# Altium PCB LEDArray8Key.PcbDoc (part 2 of 3)
Units mil, origin at the board's own origin, x right, y up, seen from the top; angles counter-clockwise.
Board outline 4724.41 x 3343 mil, 2 copper layers (Top Layer, Bottom Layer); 229 components, 203 nets, 838 pads, 171 vias.
Unrouted connection lines stored in the file: 34.
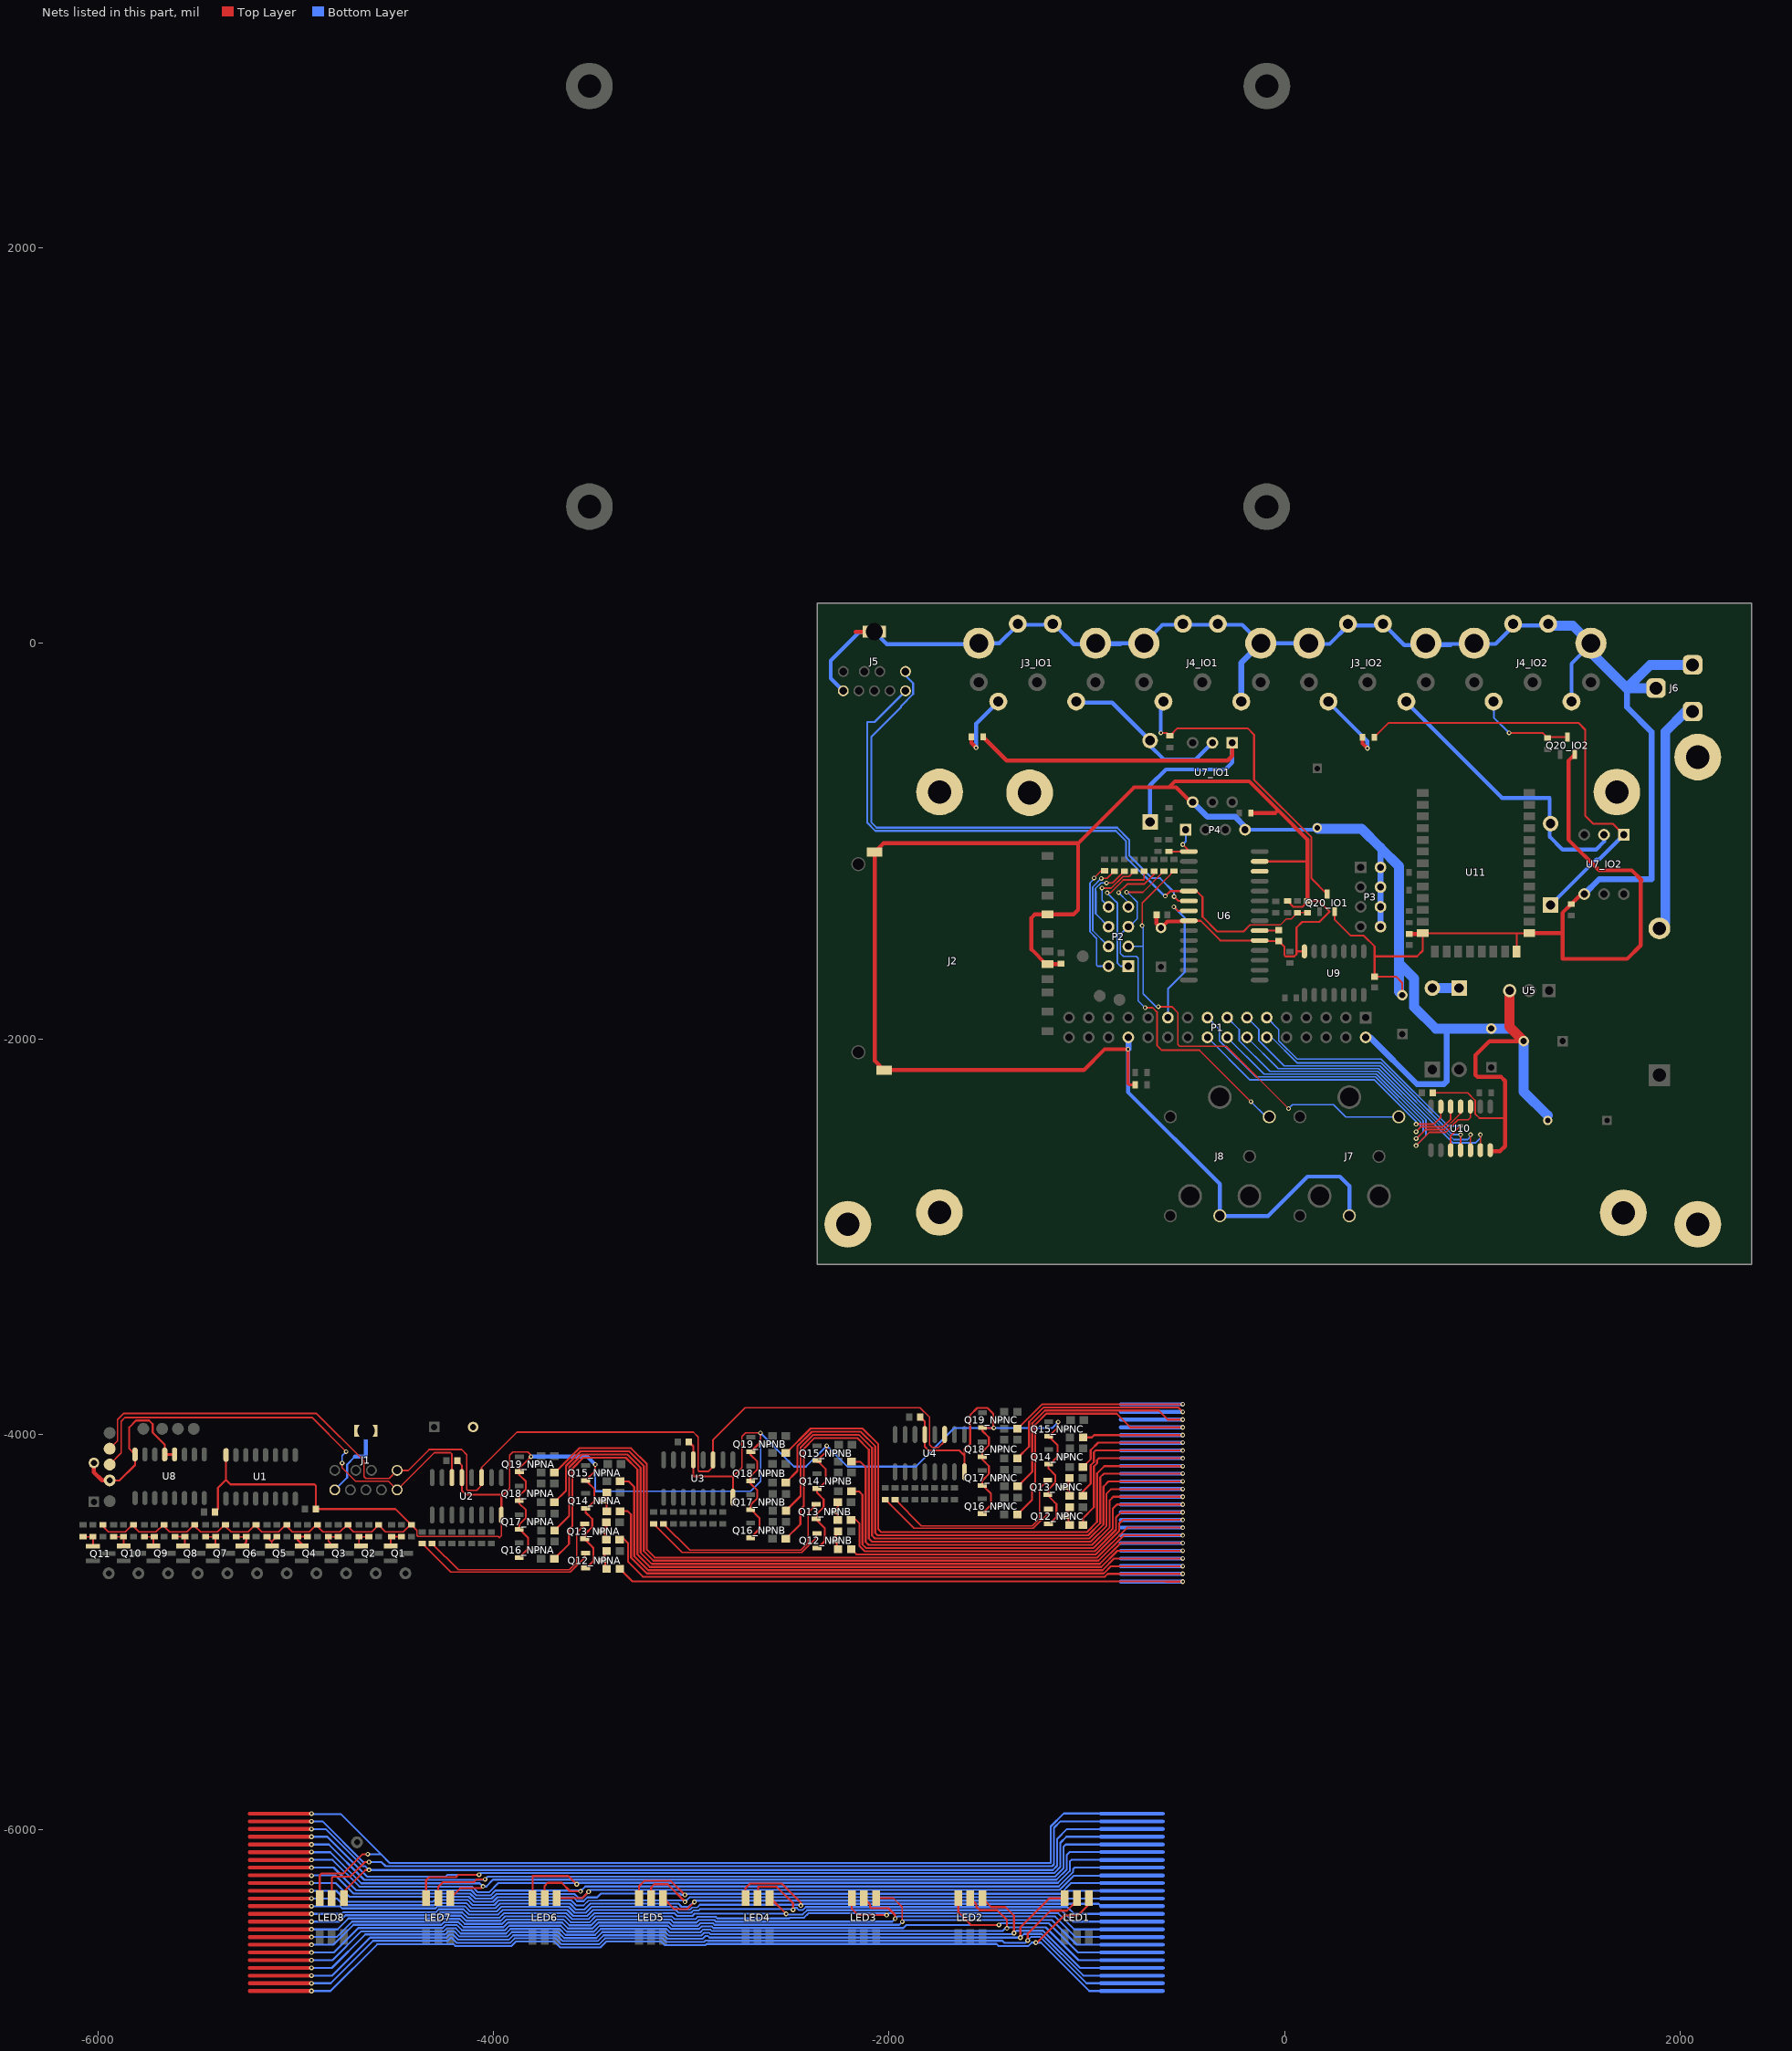
[diagram p2: the nets of this part, all layers, seen from the top]

## Via types
v1: diameter 23.62, hole 11.81, Top Layer to Bottom Layer, 171 vias

## Nets (pads, with @x,y where several pads share a name; then routed paths per layer and width w, separated by ;. In a path a pad name is that pad's centre, name@x,y a point inside that pad or via, vN(x,y) a via of type N, cw(c..) or ccw(c..) an arc to the next point about the centre after c; other vN are vias at no path point) (continued)
D8: P1.11 U10.3 | length 1383.2
  Top Layer w8: U10.3@839.78,-2563.39 839.78,-2490.51 v1(890,-2440.29)
  Bottom Layer w8: P1.11@-89.92,-1893.15 -29.45,-1953.62 -29.45,-2009.52 64.18,-2103.15 488.15,-2103.15 825.29,-2440.29 v1(890,-2440.29)
D9: P1.12 U10.4 | length 1262.1
  Top Layer w8: U10.4@889.78,-2563.39 890,-2563.17 v1(890,-2485)
  Bottom Layer w8: P1.12@-89.92,-1993.15 -65.62,-1993.15 63.05,-2121.82 487.02,-2121.82 850.2,-2485 v1(890,-2485)
D10: P1.13 U10.5 | length 1512.9
  Top Layer w8: U10.5@939.78,-2563.39 940,-2563.17 v1(940,-2485)
  Bottom Layer w8: P1.13@-189.92,-1893.15 -129.45,-1953.62 -129.45,-2009.52 -1.98,-2136.99 482.39,-2136.99 855.4,-2510 925,-2510 940,-2495 v1(940,-2485)
D11: P1.14 U10.6 | length 1506.1
  Top Layer w8: U10.6@989.78,-2563.39 990,-2563.17 v1(990,-2485)
  Bottom Layer w8: P1.14@-189.92,-1993.15 -32.08,-2150.99 476.6,-2150.99 852.03,-2526.43 965,-2526.43 990,-2501.43 v1(990,-2485)
D12: P1.15 U10.10 | length 1792.2
  Top Layer w8: v1(665,-2540.11) 732.11,-2473 814.98,-2473 877.98,-2410 928.79,-2410 939.78,-2399.01 U10.10@939.78,-2342.91
  Bottom Layer w8: P1.15@-289.92,-1893.15 -229.45,-1953.62 -229.45,-2009.52 -73.98,-2164.99 470.8,-2164.99 714.81,-2409.01 714.81,-2490.3 v1(665,-2540.11)
D13: P1.16 U10.11 | length 1588.7
  Top Layer w8: v1(665,-2505) 665,-2506.7 712.7,-2459 808.71,-2459 889.78,-2377.93 U10.11@889.78,-2342.91
  Bottom Layer w8: P1.16@-289.92,-1993.15 -104.08,-2178.99 465,-2178.99 700.81,-2414.81 700.81,-2470.89 665,-2506.7 v1(665,-2505)
D14: P1.17 U10.12 | length 1653.1
  Top Layer w8: v1(665,-2470) 690,-2445 801.3,-2445 839.78,-2406.52 U10.12@839.78,-2342.91
  Bottom Layer w8: P1.17@-389.92,-1893.15 -329.45,-1953.62 -329.45,-2009.52 -145.98,-2192.99 459.2,-2192.99 686.81,-2420.6 686.81,-2446.78 663.59,-2470 v1(665,-2470)
D15: P1.18 U10.13 | length 1438.1
  Top Layer w8: v1(665,-2432) 666,-2431 756.11,-2431 789.78,-2397.33 U10.13@789.78,-2342.91
  Bottom Layer w8: P1.18@-389.92,-1993.15 -174.92,-2208.15 454.56,-2208.15 665,-2418.59 v1(665,-2432)
DAT: J1.9 J5.9 pad.0@-5939.92,-4153.15 R74.2 R75.2 U2.14 U6.5 | length 5728.9
  Top Layer w7: -174.92,-1424.85 -21.62,-1424.85 10.08,-1393.15 35.08,-1393.15 R74.2@65.08,-1363.15 65.55,-1362.68 R75.2@115.08,-1362.68
  Top Layer w8: pad.0@-5939.92,-4153.15 -5881.77,-4095 -5881.77,-3934.29 -5862.48,-3915 -4918.07,-3915 v1(-4744.92,-4088.15) ; v1(-4764.92,-4145.44) -4764.92,-4169.4 -4697.13,-4237.19 -4530.88,-4237.19 J1.9@-4486.85,-4281.22 -4298.78,-4093.15 -4217.14,-4093.15 -4209.92,-4100.37 U2.14@-4209.92,-4215.14
  Top Layer w10: v1(-602.92,-1278.15) -577.92,-1253.15 U6.5@-484.06,-1253.15 -444.92,-1253.15 -414.92,-1283.15 -414.92,-1383.15 -339.92,-1458.15 -208.23,-1458.15 -174.92,-1424.85
  Bottom Layer w8: v1(-4764.92,-4145.44) -4764.92,-4108.15 v1(-4744.92,-4088.15)
  Bottom Layer w10: J5.9@-1916.29,-241.22 -2073.22,-398.15 -2109.36,-398.15 -2109.36,-908.64 -2069.14,-948.85 -853.08,-948.85 -801.92,-1000.01 -801.92,-1083.15 -609.92,-1275.15 v1@-609.92,-1278.15
GND: C1.2 C2.2 C3.1 C4.1 C5.1 C6.2 C7.2 C8.2 C9.1 C10.1 C11.2 C12.1 C13.1 C14.2 C15.2 C16.2 C17.2 C18.1 C19.1 J1.7 J1.C J2.3 J2.6 J2.GND J3_IO1.C J3_IO2.C J4_IO1.5 J4_IO1.C J4_IO2.5 J4_IO2.C J5.7 J5.C J6.2 J6.3 J7.SLEEVE J8.SLEEVE P1.2 P1.26 P3.2 P3.4 P3.6 P3.8 P4.4 pad.0@-5939.92,-4233.15 pad.LCD_MNT pad.PCBMNT Q12_NPNA.3 Q12_NPNB.3 Q12_NPNC.3 Q13_NPNA.3 Q13_NPNB.3 Q13_NPNC.3 Q14_NPNA.3 Q14_NPNB.3 Q14_NPNC.3 Q15_NPNA.3 Q15_NPNB.3 Q15_NPNC.3 Q16_NPNA.3 Q16_NPNB.3 Q16_NPNC.3 Q17_NPNA.3 Q17_NPNB.3 Q17_NPNC.3 Q18_NPNA.3 Q18_NPNB.3 Q18_NPNC.3 Q19_NPNA.3 Q19_NPNB.3 Q19_NPNC.3 Q20_IO1.3 Q20_IO2.3 R47.1 R48.1 R49.1 R50.1 R51.1 R52.1 R53.1 R54.1 R55.1 R56.1 R57.1 R60_IO1.2 R60_IO2.2 R75.1 R77.1 R79.1 U1.8 U2.8 U2.13 U3.8 U3.13 U4.8 U4.13 U5.2 U6.8 U6.19 U6.27 U7_IO1.4 U7_IO2.4 U8.4 U8.5 U8.8 U9.7 U10.7 U11.13 U11.21 U11.22 | length 42987.4
  Top Layer w6: R57.1@-5964.15,-4458.62 R57.1@-5974.92,-4458.62 -5974.92,-4464.82 -5946.34,-4493.4 -5860.48,-4493.4 -5825.7,-4458.62 R56.1@-5819.92,-4458.62 -5819.92,-4464.82 -5791.34,-4493.4 -5705.48,-4493.4 -5670.7,-4458.62 R55.1@-5664.92,-4458.62 -5664.92,-4464.82 -5636.34,-4493.4 -5550.48,-4493.4 -5515.7,-4458.62 R54.1@-5509.92,-4458.62 -5509.92,-4464.82 -5481.34,-4493.4 -5395.48,-4493.4 -5360.7,-4458.62 R53.1@-5354.92,-4458.62 -5354.92,-4464.82 -5326.34,-4493.4 -5240.48,-4493.4 -5205.7,-4458.62 R52.1@-5199.92,-4458.62 -5199.92,-4464.82 -5171.34,-4493.4 -5085.48,-4493.4 -5050.7,-4458.62 R51.1@-5044.92,-4458.62 -5044.92,-4464.82 -5016.34,-4493.4 -4930.48,-4493.4 -4895.7,-4458.62 R50.1@-4889.92,-4458.62 -4889.92,-4464.82 -4861.34,-4493.4 -4775.48,-4493.4 -4740.7,-4458.62 R49.1@-4734.92,-4458.62 -4734.92,-4465.12 -4706.64,-4493.4 -4653.51,-4493.4 -4653.25,-4493.15 -4614.92,-4493.15 R48.1@-4580.39,-4458.62 ; R49.1@-4729.92,-4458.62 R49.1@-4724.15,-4458.62 ; R48.1@-4579.92,-4458.62 -4545.14,-4493.4 -4488.51,-4493.4 -4488.25,-4493.15 -4455.23,-4493.15 ; -4455.48,-4493.4 -4455.23,-4493.15 ; -3969.92,-4523.15 -3976.25,-4516.82 -4381.37,-4516.82 -4386.64,-4511.55 -4386.64,-4486.91 R47.1@-4414.92,-4458.62 -4420.7,-4458.62 -4455.23,-4493.15 ; -3946.92,-4303.15 -3916.92,-4273.15 -3916.92,-4105.15 -3901.92,-4090.15 -3824.92,-4090.15 -3809.92,-4105.15 v1(-3809.92,-4113.15) -3868.51,-4171.73 Q19_NPNA.3@-3868.5,-4188.57 ; -2788.53,-4213.15 -2771.95,-4196.57 -2771.95,-4196.28 -2743.85,-4168.18 -2743.85,-4011.94 -2724.87,-3992.96 -2650.12,-3992.96 v1(-2649.92,-3993.15) -2649.92,-4023.15
  Top Layer w8: R47.1@-4414.92,-4468.15 R47.1@-4414.92,-4458.62 ; -3969.92,-4523.15 -3959.92,-4513.15 U2.8@-3959.92,-4408.06 ; C18.1@749.64,-2273.15 925.3,-2273.15 963.56,-2311.41 963.56,-2380.23 985,-2401.67 1106.56,-2401.67 1115.08,-2393.15
  Top Layer w10: pad.0@-5939.92,-4233.15 -5889.92,-4233.15 -5811.92,-4155.15 U8.8@-5811.92,-4101.91 -5841,-4072.84 -5841,-3964.34 -5806.66,-3930 -5741,-3930 -5722.46,-3948.54 -5722.46,-3991.54 -5661.92,-4052.08 U8.5@-5661.92,-4101.91 ; C1.2@-5407.36,-4393.15 -5392.36,-4378.15 -5392.36,-4270.59 -5351.92,-4230.15 ; U1.8@-5351.92,-4104.91 -5351.92,-4230.15 ; J1.7@-4806.85,-4281.22 J1.7@-4801.81,-4281.22 ; R47.1@-4414.92,-4458.62 -4495.39,-4378.15 C2.2@-4897.36,-4378.15 -4897.36,-4260.71 -4904.92,-4253.15 -5328.92,-4253.15 -5351.92,-4230.15 ; C3.1@-4182.36,-4134.63 -4159.92,-4157.07 U2.13@-4159.92,-4219.08 -4159.92,-4284.63 -4139.92,-4304.63 -3959.92,-4304.63 ; U2.8@-3959.92,-4408.06 -3959.92,-4304.63 ; -3946.92,-4303.15 -3948.41,-4304.63 -3959.92,-4304.63 ; Q16_NPNA.3@-3869.21,-4620.97 -3867.32,-4620.97 -3824.92,-4578.57 -3824.92,-4523.57 -3867.52,-4480.97 Q17_NPNA.3@-3869.21,-4480.97 -3869.21,-4456.17 -3835.58,-4422.54 -3835.58,-4383.36 -3869.21,-4349.72 Q18_NPNA.3@-3869.21,-4335.97 -3869.21,-4311.17 -3835.58,-4277.54 -3835.58,-4238.36 -3869.21,-4204.72 Q19_NPNA.3@-3869.21,-4195.97 ; Q12_NPNA.3@-3534.21,-4675.55 -3529.02,-4675.55 -3494.21,-4640.75 -3494.21,-4575.62 -3504.15,-4565.68 -3534.21,-4535.62 -3534.21,-4501.82 -3500.58,-4468.18 -3500.58,-4429 -3534.21,-4395.36 -3534.21,-4381.61 -3489.21,-4336.61 -3489.21,-4276.61 -3525.28,-4240.55 Q15_NPNA.3@-3534.21,-4240.55 ; Q15_NPNA.3@-3533.5,-4233.15 -3484.92,-4184.57 v1(-3484.92,-4153.15) ; C4.1@-3012.36,-4038.15 -2989.48,-4061.03 U3.13@-2989.48,-4129.6 -2989.48,-4207.71 -2989.92,-4208.15 -2984.92,-4213.15 -2788.53,-4213.15 -2788.53,-4317.62 U3.8@-2789.48,-4318.57 ; Q16_NPNB.3@-2699.21,-4520.97 -2697.32,-4520.97 -2654.92,-4478.57 -2654.92,-4423.57 -2697.52,-4380.97 Q17_NPNB.3@-2699.21,-4380.97 -2699.21,-4356.17 -2665.58,-4322.54 -2665.58,-4283.36 -2699.21,-4249.72 Q18_NPNB.3@-2699.21,-4235.97 -2699.21,-4211.17 -2665.58,-4177.54 -2665.58,-4138.36 -2699.21,-4104.72 Q19_NPNB.3@-2699.21,-4095.97 ; Q19_NPNB.3@-2698.51,-4088.57 -2649.92,-4039.99 -2649.92,-4023.15 ; Q12_NPNB.3@-2364.21,-4575.55 -2359.02,-4575.55 -2324.21,-4540.75 -2324.21,-4475.62 -2334.15,-4465.68 -2364.21,-4435.62 -2364.21,-4401.82 -2330.58,-4368.18 -2330.58,-4329 -2364.21,-4295.36 -2364.21,-4281.61 -2319.21,-4236.61 -2319.21,-4176.61 -2355.28,-4140.55 Q15_NPNB.3@-2364.21,-4140.55 ; Q15_NPNB.3@-2363.51,-4133.15 -2314.92,-4084.57 v1(-2314.92,-4058.15) ; C5.1@-1841.54,-3912.03 -1819.09,-3934.48 -1819.09,-4062.03 -1799.09,-4082.03 -1644.09,-4082.03 -1619.09,-4107.03 U4.8@-1619.09,-4181.52 ; U4.8@-1618.8,-4190 -1618.8,-4077.03 -1589.92,-4048.15 -1589.92,-3903.41 -1553.67,-3867.15 -1501.69,-3867.15 -1472.73,-3896.11 -1472.73,-3965.34 v1(-1469.92,-3968.15) -1525.5,-3968.15 Q19_NPNC.3@-1527.68,-3965.97 ; Q16_NPNC.3@-1528.39,-4398.37 -1526.5,-4398.37 -1484.09,-4355.97 -1484.09,-4300.97 -1526.69,-4258.37 Q17_NPNC.3@-1528.39,-4258.37 -1528.39,-4233.58 -1494.75,-4199.94 -1494.75,-4160.76 -1528.39,-4127.12 Q18_NPNC.3@-1528.39,-4113.37 -1528.39,-4088.58 -1494.75,-4054.94 -1494.75,-4015.76 -1528.39,-3982.12 Q19_NPNC.3@-1528.39,-3973.37 ; Q12_NPNC.3@-1193.39,-4452.95 -1188.19,-4452.95 -1153.39,-4418.15 -1153.39,-4353.02 -1163.32,-4343.09 -1193.39,-4313.02 -1193.39,-4279.22 -1159.75,-4245.58 -1159.75,-4206.4 -1193.39,-4172.76 -1193.39,-4159.02 -1148.39,-4114.02 -1148.39,-4054.02 -1184.45,-4017.95 Q15_NPNC.3@-1193.39,-4017.95 ; Q15_NPNC.3@-1192.68,-4010.55 -1144.92,-3962.8 v1(-1144.92,-3938.15) ; U6.8@-484.06,-1403.15 -424.92,-1403.15 -324.92,-1503.15 U6.19@-125.79,-1503.15 -123.23,-1505.71 C9.1@-29.92,-1505.71 ; U6.27@-125.79,-1103.15 108.88,-1103.15 115.08,-1109.35 ; C9.1@-17.36,-1505.71 C9.1@-29.92,-1505.71 ; R77.1@15.08,-1304.09 44.13,-1333.15 90.08,-1333.15 115.08,-1308.15 R75.1@115.08,-1303.62 173.86,-1303.62 227.68,-1357.44 175.97,-1409.15 89.08,-1409.15 60.08,-1438.15 60.08,-1558.15 ; U9.7@100.08,-1557.91 60.31,-1557.91 60.08,-1558.15 ; Q20_IO1.3@252.48,-1357.44 252.48,-1396.48 335,-1479 400.93,-1479 455.08,-1533.15 455.08,-1583.15 ; C8.2@595.08,-1779.3 595.08,-1717.06 563.61,-1685.59 C13.1@455.08,-1685.59 455.08,-1583.15 ; U11.21@1173.46,-1559.65 1173.46,-1467.95 1175.08,-1466.34 ; U11.22@1237.64,-1466.34 1175.08,-1466.34 ; C9.1@-29.92,-1505.71 -1.45,-1534.18 -1.45,-1576.96 5,-1583.4 49.54,-1583.4 60.08,-1572.87 60.08,-1558.15 ; 455.08,-1583.15 670.08,-1583.15 698.27,-1554.96 U11.13@698.27,-1466.34 1175.08,-1466.34
  Top Layer w15: U8.5@-5661.92,-4101.91 U8.4@-5611.92,-4101.91 ; v1(-791.63,-2053.15) -791.63,-2228.37 -786.85,-2233.15 R79.1@-754.53,-2233.15
  Top Layer w20: C15.2@-6019.96,-4144.72 -6019.96,-4192 -5978.81,-4233.15 pad.0@-5939.92,-4233.15 ; -2169.58,56.85 -2168.44,57.99 J5.C@-2073.77,57.99 ; C12.1@-1129.92,-1620.71 -1132.36,-1623.15 J2.3@-1197.84,-1623.15 -1204.71,-1623.15 -1279.82,-1548.05 -1279.82,-1388.15 -1262.85,-1371.18 J2.6@-1197.84,-1371.18 -1066.63,-1371.18 -1043.6,-1348.15 -1043.6,-1011.82 ; v1(-791.63,-2053.15) -909.92,-2053.15 -1015.36,-2158.58 J2.GND@-2025,-2158.58 -2072.24,-2111.34 J2.GND@-2072.24,-1056.22 -2027.85,-1011.82 -1043.6,-1011.82 ; C10.1@-647.48,-1373.15 -647.48,-1417.17 C11.2@-624.92,-1439.72 -592.06,-1406.87 -487.77,-1406.87 U6.8@-484.06,-1403.15 ; U7_IO1.4@-464.92,-803.15 -464.92,-812.68 -548.98,-728.62 -584.92,-728.62 ; R60_IO1.2@-170.39,-858.15 -46.84,-858.15 -32.91,-844.23 ; R75.1@115.08,-1303.62 115.08,-1109.35 115.08,-992.22 -32.91,-844.23 ; C19.1@640.08,-1470.59 694.02,-1470.59 U11.13@698.27,-1466.34 ; U10.7@1039.78,-2563.39 1044.54,-2568.15 1090.08,-2568.15 1115.08,-2543.15 1115.08,-2393.15 1115.08,-2213.15 1095.08,-2193.15 975.08,-2193.15 965.08,-2183.15 965.08,-2083.15 1036.14,-2012.09 C6.2@1209.08,-2012.09 ; U11.22@1237.64,-1466.34 1405.08,-1466.34 ; Q20_IO2.3@1467.48,-562.44 1435.08,-594.84 1435.08,-993.15 1590.08,-1148.15 1755.08,-1148.15 1805.08,-1198.15 1800.08,-1203.15 1800.08,-1528.15 1731.89,-1596.34 1405.08,-1596.34 1405.08,-1466.34 ; U7_IO2.4@1515.08,-1268.15 1500.55,-1268.15 R60_IO2.2@1450.08,-1318.62 1405.08,-1363.62 1405.08,-1466.34 ; -1043.6,-1011.82 -760.39,-728.62 -584.92,-728.62 ; -584.92,-728.62 -554.45,-698.15 -178.99,-698.15 -32.91,-844.23
  Top Layer w30: P1.2@410.08,-1993.15 P1.2@411.08,-1994.15
  Top Layer w50: U5.2@1137.5,-1757.09 1137.5,-1940.51 C6.2@1209.08,-2012.09
  Bottom Layer w6: -3449.92,-4288.15 -2699.92,-4288.15 -2649.92,-4238.15 v1(-2649.92,-3993.15)
  Bottom Layer w10: J1.7@-4801.81,-4281.22 -4739.92,-4219.33 -4739.92,-4153.15 -4699.92,-4113.15 ; v1(-3484.92,-4153.15) -3484.92,-4288.15 -3449.92,-4288.15 ; v1(-2649.92,-3993.15) -2479.92,-4163.15 -2419.92,-4163.15 v1(-2314.92,-4058.15) -2209.92,-4163.15 -1864.92,-4163.15 -1669.92,-3968.15 v1(-1469.92,-3968.15) -1174.92,-3968.15 v1(-1144.92,-3938.15)
  Bottom Layer w20: -4699.92,-4113.15 -4644.92,-4113.15 -4644.92,-3982.6 J1.C@-4644.33,-3982.01 ; v1(-3809.92,-4113.15) -3524.92,-4113.15 v1(-3484.92,-4153.15) ; J5.7@-2231.25,-241.22 -2294.36,-178.11 -2294.36,-88.15 -2148.22,57.99 J5.C@-2073.77,57.99 -2010.78,-5 -1550.93,-5 J3_IO1.C@-1545.93,0 -1442.51,0 -1349.08,93.42 -1163.81,93.42 -1065.38,-5 -830.93,-5 -825.93,0 ; J3_IO1.C@-955.38,0 -825.93,0 ; v1(-791.63,-2053.15) -791.63,-2269.72 -327.06,-2734.29 -327.06,-2896.15 -84.12,-2896.15 115.41,-2696.63 280,-2696.63 327.5,-2744.13 J7.SLEEVE@327.5,-2895 ; P4.4@-199.92,-943.15 155.08,-943.15 C17.2@165.08,-933.15 ; J3_IO2.C@715.09,-4.16 844.54,-4.16 ; J4_IO2.C@1331.67,89.27 1160.08,89.27 1066.65,-4.16 844.54,-4.16 ; J4_IO2.5@1450.63,-295.28 1450.63,-103.62 J4_IO2.C@1550.09,-4.16 ; -825.93,0 J4_IO1.C@-710.93,0 -617.51,93.42 -213.81,93.42 J4_IO1.C@-120.38,0 120.38,0 124.54,-4.16 227.96,-4.16 321.39,89.27 506.67,89.27 605.09,-9.16 839.54,-9.16 844.54,-4.16
  Bottom Layer w30: v1(-791.63,-2053.15) -789.92,-2051.44 P1.26@-789.92,-1993.15 ; U7_IO1.4@-464.92,-803.15 -390.34,-877.73 -249.92,-877.73 -199.92,-927.73 P4.4@-199.92,-943.15 ; J4_IO1.5@-218.81,-295.28 -218.81,-98.43 J4_IO1.C@-120.38,0 ; P1.2@410.08,-1993.15 433.15,-1993.15 670,-2230 805,-2230 820.08,-2214.92 820.08,-1948.44 ; P3.8@485.08,-1433.15 P3.6@485.08,-1333.15 P3.4@485.08,-1233.15 P3.2@485.08,-1133.15 485.08,-1033.76 ; U7_IO2.4@1515.08,-1268.15 1590.08,-1193.15 1855.08,-1193.15 1855.08,-448.15 1730.64,-323.71 1730.64,-228.15
  Bottom Layer w50: C17.2@165.08,-933.15 170.08,-938.15 389.47,-938.15 485.08,-1033.76 578.45,-1127.13 578.45,-1618.15 ; C8.2@595.08,-1779.3 578.45,-1762.67 578.45,-1618.15 ; U5.2@1137.5,-1757.09 1137.5,-1940.51 1129.58,-1948.44 C7.2@1045.08,-1948.44 820.08,-1948.44 764.21,-1948.44 655.08,-1839.3 655.08,-1694.78 578.45,-1618.15 ; C6.2@1209.08,-2012.09 1209.08,-2267.15 1330.08,-2388.15 ; J4_IO2.C@1331.67,89.27 1456.67,89.27 1550.09,-4.16 1550.09,-47.6 1730.64,-228.15 ; J6.3@1878.08,-227.15 1877.08,-228.15 1730.64,-228.15 ; J6.2@2063.12,-109.04 2062.12,-110.04 1848.75,-110.04 1730.64,-228.15
L1: LED1.6 R1_NPNA.1 | length 8658.5
  Top Layer w10: R1_NPNA.1@-3360.75,-4680.75 -3297.35,-4744.15 -515.85,-4744.15 v1(-515,-4745) -600,-4745 ; v1@-1254.92,-6567.15 -1247.92,-6567.15 -1113.93,-6433.16 -1044.91,-6433.16 -989.56,-6377.8 LED1.6@-989.56,-6345.48
  Top Layer w19.68: -5232.47,-6815.15 v1(-4919.71,-6815.15)
  Bottom Layer w10: v1(-4919.71,-6815.15) -4823.9,-6815.15 -4587.9,-6579.15 -4200.1,-6579.15 -4191.25,-6587.99 -3909.45,-6587.99 -3886.61,-6565.15 -3692.16,-6565.15 -3662.32,-6594.99 -3459.49,-6594.99 -3429.64,-6565.15 -3151.28,-6565.15 -3133.28,-6583.15 -2928.53,-6583.15 -2921.53,-6576.15 -2920.52,-6577.15 -1456.92,-6577.15 -1446.92,-6587.15 -1294.66,-6587.15 -1277.66,-6570.15 v1(-1257.92,-6570.15) -1231.92,-6570.15 -986.92,-6815.15 -927.9,-6815.15 ; -650.87,-4745 v1(-515,-4745)
  Bottom Layer w19.68: -927.9,-6815.15 -615.15,-6815.15 ; -827.76,-4745 v1(-515,-4745)
L2: LED1.4 R4_NPNA.1 | length 8858.4
  Top Layer w10: R4_NPNA.1@-3361.46,-4528.15 -3341.81,-4528.15 -3319.92,-4550.04 -3319.92,-4644.08 -3244,-4720 -908.09,-4720 -894.09,-4706 v1(-515,-4706) ; v1(-1298.92,-6559.15) -1298.92,-6525.17 -1182.9,-6409.15 -1100.66,-6409.15 -1050.58,-6359.07 LED1.4@-1050.58,-6345.48
  Top Layer w19.68: -5232.47,-6776.15 v1(-4919.71,-6776.15)
  Bottom Layer w10: v1(-4919.71,-6776.15) -4822.9,-6776.15 -4607.9,-6561.15 -4230.92,-6561.15 -4215.92,-6546.15 -4210.47,-6546.15 -4184.63,-6571.99 -3916.08,-6571.99 -3893.24,-6549.15 -3685.53,-6549.15 -3655.69,-6578.99 -3466.11,-6578.99 -3436.27,-6549.15 -3144.65,-6549.15 -3126.65,-6567.15 -2935.15,-6567.15 -2928.15,-6560.15 -2914.9,-6560.15 -2913.9,-6561.15 -1426.92,-6561.15 -1416.92,-6571.15 -1310.92,-6571.15 v1(-1298.92,-6559.15) -1281.92,-6542.15 -1234.92,-6542.15 -1000.92,-6776.15 -927.9,-6776.15 ; -827.76,-4706 v1(-515,-4706)
  Bottom Layer w19.68: -927.9,-6776.15 -615.15,-6776.15 ; -827.76,-4706 v1(-515,-4706)
L3: LED1.2 R7_NPNA.1 | length 8943.9
  Top Layer w10: R7_NPNA.1@-3359.56,-4389.21 -3361.46,-4389.21 -3361.14,-4388.89 -3321.09,-4388.89 -3303.92,-4406.06 -3303.92,-4623.67 -3224.44,-4703.15 -913.87,-4703.15 -877.72,-4667 v1(-515,-4667) ; v1(-1335.92,-6545.15) -1335.92,-6493.17 -1188.9,-6346.15 -1112.27,-6346.15 LED1.2@-1111.6,-6345.48
  Top Layer w19.68: -5232.47,-6737.15 v1(-4919.71,-6737.15)
  Bottom Layer w10: v1(-4919.71,-6737.15) -4814.9,-6737.15 -4622.9,-6545.15 -4237.55,-6545.15 -4222.55,-6530.15 -4203.84,-6530.15 -4178,-6555.99 -3922.71,-6555.99 -3899.86,-6533.15 -3678.91,-6533.15 -3649.06,-6562.99 -3472.74,-6562.99 -3442.9,-6533.15 -3138.03,-6533.15 -3121.03,-6550.15 -2940.78,-6550.15 -2926.78,-6536.15 -2916.27,-6536.15 -2907.27,-6545.15 v1(-1335.92,-6545.15) -1316.92,-6526.15 -1228.29,-6526.15 -1017.29,-6737.15 -927.9,-6737.15 ; -827.76,-4667 v1(-515,-4667)
  Bottom Layer w19.68: -927.9,-6737.15 -615.15,-6737.15 ; -827.76,-4667 v1(-515,-4667)
L4: LED2.6 R10_NPNA.1 | length 9015.2
  Top Layer w10: R10_NPNA.1@-3361.46,-4242.32 R10_NPNA.1@-3361.46,-4239.21 ; R10_NPNA.1@-3361.46,-4238.45 -3315.48,-4238.45 -3287.92,-4266 -3287.92,-4617.04 -3217.81,-4687.15 -920.5,-4687.15 -861.35,-4628 v1(-515,-4628) ; LED2.6@-1527.63,-6345.48 -1482.96,-6390.15 -1412.29,-6390.15 -1367.92,-6434.52 v1(-1367.92,-6522.15)
  Top Layer w19.68: -5232.47,-6698.15 v1(-4919.71,-6698.15)
  Bottom Layer w10: v1(-4919.71,-6698.15) -4816.9,-6698.15 -4647.9,-6529.15 -4244.18,-6529.15 -4229.18,-6514.15 -4197.21,-6514.15 -4171.37,-6539.99 -3929.33,-6539.99 -3906.49,-6517.15 -3672.28,-6517.15 -3642.44,-6546.99 -3479.37,-6546.99 -3449.53,-6517.15 -3131.4,-6517.15 -3114.4,-6534.15 -2947.41,-6534.15 -2933.41,-6520.15 -2909.64,-6520.15 -2901.64,-6528.15 -1373.92,-6528.15 v1(-1367.92,-6522.15) -1355.92,-6510.15 -1221.67,-6510.15 -1033.67,-6698.15 -927.9,-6698.15 ; -827.76,-4628 v1(-515,-4628)
  Bottom Layer w19.68: -927.9,-6698.15 -615.15,-6698.15 ; -827.76,-4628 v1(-515,-4628)
L5: LED2.4 R13_NPNA.1 | length 9845.2
  Top Layer w10: R13_NPNA.1@-3691.46,-4628.57 -3617.92,-4555.03 -3617.92,-4480.44 -3600.92,-4463.44 -3600.92,-4173.51 -3545.94,-4118.53 -3331.07,-4118.53 -3271.92,-4177.68 -3271.92,-4608.04 -3209.92,-4670.04 -3209.92,-4671.15 -927.13,-4671.15 -844.98,-4589 v1(-515,-4589) ; LED2.4@-1588.65,-6345.48 -1558.31,-6375.82 -1558.31,-6389.41 -1541.57,-6406.15 -1452.92,-6406.15 -1403.92,-6455.15 v1(-1403.92,-6498.15)
  Top Layer w19.68: -5232.47,-6659.15 v1(-4919.71,-6659.15)
  Bottom Layer w10: v1(-4919.71,-6659.15) -4813.9,-6659.15 -4667.9,-6513.15 -4250.8,-6513.15 -4235.8,-6498.15 -4190.59,-6498.15 -4164.74,-6523.99 -3935.96,-6523.99 -3913.12,-6501.15 -3665.65,-6501.15 -3635.81,-6530.99 -3486,-6530.99 -3456.15,-6501.15 -3124.77,-6501.15 -3107.77,-6518.15 -2954.04,-6518.15 -2940.04,-6504.15 -2903.02,-6504.15 -2895.02,-6512.15 -1427.04,-6512.15 -1413.04,-6498.15 v1(-1403.92,-6498.15) -1398.92,-6493.15 -1207.9,-6493.15 -1041.9,-6659.15 -927.9,-6659.15 ; -827.76,-4589 v1(-515,-4589)
  Bottom Layer w19.68: -927.9,-6659.15 -615.15,-6659.15 ; -827.76,-4589 v1(-515,-4589)
L6: LED2.2 R16_NPNA.1 | length 9737.7
  Top Layer w10: R16_NPNA.1@-3690.75,-4486.17 -3616.92,-4412.34 -3616.92,-4166.89 -3552.56,-4102.53 -3322.43,-4102.53 -3255.92,-4169.04 -3255.92,-4599.04 -3199.81,-4655.15 -933.75,-4655.15 -828.6,-4550 v1(-515,-4550) ; LED2.2@-1649.67,-6345.48 -1649.67,-6416.38 -1584.9,-6481.15 v1(-1443.92,-6481.15)
  Top Layer w19.68: -5232.47,-6620.15 v1(-4919.71,-6620.15)
  Bottom Layer w10: v1(-4919.71,-6620.15) -4806.9,-6620.15 -4682.9,-6496.15 -4256.43,-6496.15 -4242.43,-6482.15 -4183.96,-6482.15 -4158.12,-6507.99 -3942.59,-6507.99 -3919.75,-6485.15 -3659.03,-6485.15 -3629.18,-6514.99 -3492.62,-6514.99 -3462.78,-6485.15 -3118.14,-6485.15 -3102.14,-6501.15 -2959.66,-6501.15 -2946.66,-6488.15 -2896.39,-6488.15 -2888.39,-6496.15 -1927.92,-6496.15 -1912.92,-6481.15 v1(-1443.92,-6481.15) -1434.92,-6472.15 -1192.9,-6472.15 -1044.9,-6620.15 -927.9,-6620.15 ; -827.76,-4550 v1(-515,-4550)
  Bottom Layer w19.68: -927.9,-6620.15 -615.15,-6620.15 ; -827.76,-4550 v1(-515,-4550)
L7: LED3.6 R19_NPNA.1 | length 9351.5
  Top Layer w8: -1978.57,-6345.48 -1932.92,-6391.13 v1(-1932.92,-6465.15)
  Top Layer w10: R19_NPNA.1@-3691.46,-4343.57 -3632.92,-4285.03 -3632.92,-4160.26 -3559.19,-4086.53 -3313.43,-4086.53 -3239.92,-4160.04 -3239.92,-4590.78 -3191.55,-4639.15 -940.38,-4639.15 -812.23,-4511 v1(-515,-4511) ; LED3.6@-2065.7,-6345.48 -1978.57,-6345.48
  Top Layer w19.68: -5232.47,-6581.15 v1(-4919.71,-6581.15)
  Bottom Layer w10: v1(-4919.71,-6581.15) -4808.9,-6581.15 -4707.9,-6480.15 -4263.06,-6480.15 -4249.06,-6466.15 -4177.33,-6466.15 -4151.49,-6491.99 -3949.22,-6491.99 -3926.37,-6469.15 -3652.4,-6469.15 -3622.56,-6498.99 -3499.25,-6498.99 -3469.41,-6469.15 -3111.52,-6469.15 -3095.52,-6485.15 -2966.29,-6485.15 -2953.29,-6472.15 -2889.76,-6472.15 -2881.76,-6480.15 -1947.92,-6480.15 v1(-1932.92,-6465.15) -1923.92,-6456.15 -1175.9,-6456.15 -1050.9,-6581.15 -927.9,-6581.15 ; -650.87,-4511 v1(-515,-4511)
  Bottom Layer w19.68: -927.9,-6581.15 -615.15,-6581.15 ; -827.76,-4511 v1(-515,-4511)
L8: LED3.4 R22_NPNA.1 | length 9207.3
  Top Layer w10: R22_NPNA.1@-3691.46,-4194.63 -3689.92,-4194.63 -3565.82,-4070.53 -3304.43,-4070.53 -3223.92,-4151.04 -3223.92,-4584.15 -3184.92,-4623.15 -947.01,-4623.15 -795.86,-4472 v1(-515,-4472) ; LED3.4@-2126.72,-6345.48 -2096.38,-6375.82 -2096.38,-6389.41 -2089.94,-6395.85 -2003.92,-6395.85 -1968.92,-6430.85 v1(-1968.92,-6449.15)
  Top Layer w19.68: -5232.47,-6542.15 v1(-4919.71,-6542.15)
  Bottom Layer w10: v1(-4919.71,-6542.15) -4792.53,-6542.15 -4714.53,-6464.15 -4269.69,-6464.15 -4255.69,-6450.15 -4170.7,-6450.15 -4144.86,-6475.99 -3955.84,-6475.99 -3933,-6453.15 -3645.77,-6453.15 -3615.93,-6482.99 -3505.88,-6482.99 -3476.04,-6453.15 -3104.89,-6453.15 -3088.89,-6469.15 -2972.92,-6469.15 -2959.92,-6456.15 -2883.13,-6456.15 -2875.13,-6464.15 -1983.92,-6464.15 v1(-1968.92,-6449.15) -1957.92,-6438.15 -1159.9,-6438.15 -1055.9,-6542.15 -927.9,-6542.15 ; -647.58,-4472 v1(-515,-4472)
  Bottom Layer w19.68: -927.9,-6542.15 -615.15,-6542.15 ; -827.76,-4472 v1(-515,-4472)
L9: LED3.2 R1_NPNB.1 | length 7407.5
  Top Layer w10: R1_NPNB.1@-2190.75,-4580.75 -2164.35,-4607.15 -953.64,-4607.15 -836,-4489.51 -836,-4451 -818,-4433 v1(-515,-4433) ; LED3.2@-2187.75,-6345.48 -2187.92,-6345.66 -2187.92,-6400.15 -2156.92,-6431.15 v1(-2011.92,-6431.15)
  Top Layer w19.68: -5232.47,-6503.15 v1(-4919.71,-6503.15)
  Bottom Layer w10: v1(-4919.71,-6503.15) -4787.9,-6503.15 -4732.9,-6448.15 -4276.31,-6448.15 -4262.31,-6434.15 -4164.08,-6434.15 -4138.23,-6459.99 -3962.47,-6459.99 -3939.63,-6437.15 -3639.14,-6437.15 -3609.3,-6466.99 -3512.51,-6466.99 -3482.66,-6437.15 -3098.26,-6437.15 -3083.26,-6452.15 -2978.54,-6452.15 -2966.54,-6440.15 -2876.51,-6440.15 -2868.51,-6448.15 -2504.01,-6448.15 -2499.82,-6443.96 -2429.22,-6443.96 -2407.41,-6422.15 -2020.92,-6422.15 v1(-2011.92,-6431.15) -2002.92,-6422.15 -1143.9,-6422.15 -1062.9,-6503.15 -927.9,-6503.15 ; -827.76,-4433 v1(-515,-4433)
  Bottom Layer w19.68: -927.9,-6503.15 -615.15,-6503.15 ; -827.76,-4433 v1(-515,-4433)
L10: LED4.6 R4_NPNB.1 | length 7398.1
  Top Layer w10: LED4.6@-2603.77,-6345.48 -2599.59,-6345.48 v1(-2519.92,-6425.15) ; R4_NPNB.1@-2191.46,-4428.15 -2171.81,-4428.15 -2149.92,-4450.04 -2149.92,-4564.16 -2122.93,-4591.15 -960.26,-4591.15 -852,-4482.89 -852,-4420 -826,-4394 v1(-515,-4394)
  Top Layer w19.68: -5232.47,-6464.15 v1(-4919.71,-6464.15)
  Bottom Layer w10: v1(-4919.71,-6464.15) -4779.9,-6464.15 -4747.9,-6432.15 -4282.94,-6432.15 -4268.94,-6418.15 -4157.45,-6418.15 -4131.61,-6443.99 -3969.1,-6443.99 -3946.26,-6421.15 -3632.52,-6421.15 -3602.67,-6450.99 -3519.13,-6450.99 -3489.29,-6421.15 -3084.79,-6421.15 -3070.79,-6435.15 -2993.85,-6435.15 -2982.85,-6424.15 -2520.92,-6424.15 v1(-2519.92,-6425.15) -2516.92,-6428.15 -2506.63,-6428.15 -2506.44,-6427.96 -2435.85,-6427.96 -2414.03,-6406.15 -1128.92,-6406.15 -1070.92,-6464.15 -927.9,-6464.15 ; -827.76,-4394 v1(-515,-4394)
  Bottom Layer w19.68: -927.9,-6464.15 -615.15,-6464.15 ; -827.76,-4394 v1(-515,-4394)
L11: LED4.4 R7_NPNB.1 | length 7738.7
  Top Layer w10: LED4.4@-2664.79,-6345.48 -2660.9,-6341.59 -2660.9,-6288.15 -2567.9,-6288.15 -2484.92,-6371.13 v1(-2484.92,-6405.15) ; R7_NPNB.1@-2189.56,-4289.21 -2191.46,-4289.21 -2191.14,-4288.89 -2151.09,-4288.89 -2133.92,-4306.06 -2133.92,-4557.53 -2116.3,-4575.15 -966.89,-4575.15 -868,-4476.26 -868,-4375 -848,-4355 v1(-515,-4355)
  Top Layer w19.68: -5232.47,-6425.15 v1(-4919.71,-6425.15)
  Bottom Layer w10: v1(-4919.71,-6425.15) -4766.9,-6425.15 -4757.9,-6416.15 -4289.57,-6416.15 -4275.57,-6402.15 -4150.82,-6402.15 -4124.98,-6427.99 -3975.73,-6427.99 -3952.88,-6405.15 -3625.89,-6405.15 -3596.05,-6434.99 -3525.76,-6434.99 -3495.92,-6405.15 -3078.16,-6405.15 -3067.75,-6415.56 ; -3065.67,-6417.63 -3064.16,-6419.15 -3000.48,-6419.15 -2988.48,-6407.15 -2976.55,-6407.15 -2975.55,-6408.15 -2962.29,-6408.15 -2954.29,-6400.15 -2489.92,-6400.15 v1(-2484.92,-6405.15) -2474.92,-6395.15 -2466.18,-6395.15 -2455.37,-6405.96 -2436.47,-6405.96 -2420.66,-6390.15 -1098.9,-6390.15 -1063.9,-6425.15 -927.9,-6425.15 ; -827.76,-4355 v1(-515,-4355)
  Bottom Layer w19.68: -927.9,-6425.15 -615.15,-6425.15 ; -827.76,-4355 v1(-515,-4355)
L12: LED4.2 R10_NPNB.1 | length 7974.1
  Top Layer w10: LED4.2@-2725.82,-6345.48 -2725.82,-6295.06 -2702.9,-6272.15 -2541.9,-6272.15 -2445.92,-6368.13 v1(-2445.92,-6383.15) ; R10_NPNB.1@-2191.46,-4142.32 R10_NPNB.1@-2191.46,-4139.21 ; R10_NPNB.1@-2191.46,-4138.45 -2145.48,-4138.45 -2117.92,-4166 -2117.92,-4544.6 -2103.37,-4559.15 -973.52,-4559.15 -884,-4469.63 -884,-4334 -866,-4316 v1(-515,-4316)
  Top Layer w19.68: -5232.47,-6386.15 v1(-4919.71,-6386.15)
  Bottom Layer w8: -3100.92,-6389.15 -3072.94,-6389.15 -3057.94,-6404.15 -3006.69,-6404.15 -2994.69,-6392.15 -2968.92,-6392.15
  Bottom Layer w10: v1(-4919.71,-6386.15) -4775.53,-6386.15 -4764.53,-6397.15 -4293.2,-6397.15 -4282.2,-6386.15 -4144.19,-6386.15 -4118.35,-6411.99 -3982.35,-6411.99 -3959.51,-6389.15 -3619.26,-6389.15 -3589.42,-6418.99 -3532.39,-6418.99 -3502.54,-6389.15 -3100.92,-6389.15 ; -2968.92,-6392.15 -2955.92,-6379.15 -2449.92,-6379.15 v1(-2445.92,-6383.15) -2436.92,-6374.15 -939.9,-6374.15 -927.9,-6386.15 ; -827.76,-4316 v1(-515,-4316)
  Bottom Layer w19.68: -927.9,-6386.15 -615.15,-6386.15 ; -827.76,-4316 v1(-515,-4316)
L13: LED5.6 R13_NPNB.1 | length 8643
  Top Layer w10: LED5.6@-3141.84,-6345.48 -3087.17,-6400.15 -3018.92,-6400.15 v1(-2983.92,-6365.15) ; R13_NPNB.1@-2521.46,-4528.57 -2447.92,-4455.03 -2447.92,-4380.44 -2430.92,-4363.44 -2430.92,-4073.51 -2375.94,-4018.53 -2161.07,-4018.53 -2101.92,-4077.68 -2101.92,-4527.16 -2085.93,-4543.15 -980.14,-4543.15 -900,-4463 -900,-4300 -877,-4277 v1(-515,-4277)
  Top Layer w19.68: -5232.47,-6347.15 v1(-4919.71,-6347.15)
  Bottom Layer w8: v1@-2986.41,-6362.66 v1@-2981.79,-6358.04
  Bottom Layer w10: v1(-4919.71,-6347.15) -4791.9,-6347.15 -4757.9,-6381.15 -4299.82,-6381.15 -4288.82,-6370.15 -4137.57,-6370.15 -4111.72,-6395.99 -3988.98,-6395.99 -3966.14,-6373.15 -3612.63,-6373.15 -3582.79,-6402.99 -3539.01,-6402.99 -3509.17,-6373.15 -3064.9,-6373.15 -3048.9,-6389.15 -3012.9,-6389.15 v1@-2986.41,-6362.66 ; v1@-2981.79,-6358.04 -1122.89,-6358.04 -1112,-6347.15 -927.9,-6347.15 ; -827.76,-4277 v1(-515,-4277)
  Bottom Layer w19.68: -927.9,-6347.15 -615.15,-6347.15 ; -827.76,-4277 v1(-515,-4277)
L14: LED5.4 R16_NPNB.1 | length 8624
  Top Layer w10: LED5.4@-3202.86,-6345.48 -3202.86,-6291.11 -3186.9,-6275.15 -3132.9,-6275.15 ; -3132.9,-6275.18 -3119.9,-6275.18 v1(-3030.93,-6364.15) ; R16_NPNB.1@-2520.75,-4386.17 -2446.92,-4312.34 -2446.92,-4066.89 -2382.56,-4002.53 -2152.43,-4002.53 -2085.92,-4069.04 -2085.92,-4512.16 -2070.93,-4527.15 -986.77,-4527.15 -916,-4456.38 -916,-4265 -889,-4238 v1(-515,-4238)
  Top Layer w19.68: -5232.47,-6308.15 v1(-4919.71,-6308.15)
  Bottom Layer w8: -3581.01,-6382.15 -3543.5,-6382.15 -3519.5,-6358.15 -3462.92,-6358.15 -3461.92,-6357.15
  Bottom Layer w10: v1(-4919.71,-6308.15) -4793.75,-6308.15 -4737.9,-6363.99 -4305.29,-6363.99 -4295.45,-6354.15 -4130.94,-6354.15 -4105.1,-6379.99 -3995.61,-6379.99 -3972.77,-6357.15 -3606.01,-6357.15 -3581.01,-6382.15 ; -3461.92,-6357.15 -3037.93,-6357.15 v1(-3030.93,-6364.15) -3006.93,-6340.15 -1127.63,-6340.15 -1095.63,-6308.15 -927.9,-6308.15 ; -827.76,-4238 v1(-515,-4238)
  Bottom Layer w19.68: -927.9,-6308.15 -615.15,-6308.15 ; -827.76,-4238 v1(-515,-4238)
L15: LED5.2 R19_NPNB.1 | length 8602.5
  Top Layer w10: LED5.2@-3263.89,-6345.48 -3263.89,-6285.13 -3236.9,-6258.15 -3102.92,-6258.15 v1(-3031.92,-6329.15) ; R19_NPNB.1@-2521.46,-4243.57 -2462.92,-4185.03 -2462.92,-4060.26 -2389.19,-3986.53 -2143.43,-3986.53 -2069.92,-4060.04 -2069.92,-4499.6 -2058.37,-4511.15 -993.4,-4511.15 -932,-4449.75 -932,-4217 -914,-4199 v1(-515,-4199)
  Top Layer w19.68: -5232.47,-6269.15 v1(-4919.71,-6269.15)
  Bottom Layer w10: v1(-4919.71,-6269.15) -4796.9,-6269.15 -4727.9,-6338.15 -4124.31,-6338.15 -4098.47,-6363.99 -4002.24,-6363.99 -3979.39,-6341.15 -3595.53,-6341.15 -3576.29,-6360.39 -3543.53,-6360.39 -3525.29,-6342.15 -3475.92,-6342.15 -3455.92,-6322.15 -3055.9,-6322.15 -3048.9,-6329.15 v1(-3031.92,-6329.15) -3025.92,-6323.15 -1133.26,-6323.15 -1079.26,-6269.15 -927.9,-6269.15 ; -827.76,-4199 v1(-515,-4199)
  Bottom Layer w19.68: -927.9,-6269.15 -615.15,-6269.15 ; -827.76,-4199 v1(-515,-4199)
L16: LED6.6 R22_NPNB.1 | length 8345.6
  Top Layer w10: LED6.6@-3675.24,-6350.15 LED6.6@-3679.91,-6345.48 -3551.25,-6345.48 v1(-3518.92,-6313.15) ; R22_NPNB.1@-2521.46,-4094.63 -2519.92,-4094.63 -2395.82,-3970.53 -2134.43,-3970.53 -2053.92,-4051.04 -2053.92,-4481.04 -2039.81,-4495.15 -1000.03,-4495.15 -948,-4443.12 -948,-4198 -911.51,-4161.51 v1(-515,-4161.51)
  Top Layer w19.68: -5232.47,-6230.15 v1@-4919.71,-6230.15
  Bottom Layer w10: v1@-4919.71,-6230.15 -4799.9,-6230.15 -4707.9,-6322.15 -4117.68,-6322.15 -4091.84,-6347.99 -4008.86,-6347.99 -3986.02,-6325.15 -3588.9,-6325.15 -3569.67,-6344.39 -3550.16,-6344.39 v1(-3518.92,-6313.15) -3508.92,-6303.15 -1135.88,-6303.15 -1064.39,-6231.66 -927.9,-6231.66 ; -827.76,-4160 v1@-515,-4160
  Bottom Layer w19.68: -927.9,-6231.66 -615.15,-6231.66 ; -827.76,-4160 v1@-515,-4160
  other v1: -4919.71,-6231.66
L17: LED6.4 R1_NPNC.1 | length 6432.7
  Top Layer w10: LED6.4@-3740.93,-6345.48 -3740.93,-6283.15 -3725.93,-6268.15 -3654.92,-6268.15 -3611.92,-6311.15 v1(-3559.92,-6311.15) ; R1_NPNC.1@-1019.92,-4458.15 -1019.92,-4425.04 -964,-4369.12 -964,-4162.63 -948,-4146.63 -948,-4131.24 -937.76,-4121 v1(-515,-4121)
  Top Layer w19.68: -5232.47,-6191.15 v1(-4919.71,-6191.15)
  Bottom Layer w10: v1(-4919.71,-6191.15) -4807.9,-6191.15 -4692.9,-6306.15 -4111.06,-6306.15 -4085.21,-6331.99 -4015.49,-6331.99 -3990.65,-6307.15 -3563.92,-6307.15 v1@-3560.87,-6310.2 ; v1@-3560.93,-6312.16 v1(-3559.92,-6311.15) -3534.92,-6286.15 -1141.51,-6286.15 -1069.9,-6214.54 -1069.9,-6200.15 -1060.9,-6191.15 -927.9,-6191.15 ; -827.76,-4121 v1(-515,-4121)
  Bottom Layer w19.68: -927.9,-6191.15 -615.15,-6191.15 ; -827.76,-4121 v1(-515,-4121)
L18: LED6.2 R4_NPNC.1 | length 6449.7
  Top Layer w10: LED6.2@-3801.96,-6345.48 -3800.9,-6344.42 -3800.9,-6233.15 -3621.9,-6233.15 -3579.9,-6275.15 v1(-3578.92,-6275.15) ; R4_NPNC.1@-1019.46,-4310.15 -1019.46,-4289.46 -980,-4250 -980,-4156 -964,-4140 -964,-4090 -955.93,-4081.93 -911.93,-4081.93 v1(-515,-4082)
  Top Layer w19.68: -5232.47,-6152.15 v1(-4919.71,-6152.15)
  Bottom Layer w10: v1(-4919.71,-6152.15) -4812.9,-6152.15 -4677.9,-6287.15 -4107.43,-6287.15 -4078.59,-6315.99 -4022.12,-6315.99 -3975.28,-6269.15 v1@-3585.9,-6269.15 ; v1(-3578.92,-6275.15) -3571.92,-6268.15 -1146.14,-6268.15 -1085.9,-6207.91 -1085.9,-6160.15 -1077.9,-6152.15 -927.9,-6152.15 ; -827.76,-4082 v1(-515,-4082)
  Bottom Layer w19.68: -927.9,-6152.15 -615.15,-6152.15 ; -827.76,-4082 v1(-515,-4082)
L19: LED7.6 R7_NPNC.1 | length 6205.8
  Top Layer w10: LED7.6@-4217.98,-6345.48 -4167.65,-6295.15 -4061.9,-6295.15 v1(-4052.9,-6286.15) ; R7_NPNC.1@-1018.74,-4166.61 -1020.63,-4166.61 -980,-4125.98 -980,-4080 -941.93,-4041.93 v1(-515,-4042)
  Top Layer w19.68: -5232.47,-6113.15 v1@-4919.71,-6113.15
  Bottom Layer w10: v1@-4919.71,-6113.15 -4824.9,-6113.15 -4667.9,-6270.15 -4068.9,-6270.15 v1(-4052.9,-6286.15) -4035.92,-6286.15 -4001.92,-6252.15 -1152.77,-6252.15 -1101.9,-6201.29 -1101.9,-6127.15 -1086.9,-6112.15 -927.9,-6112.15 ; -827.76,-4043 v1@-515,-4043
  Bottom Layer w19.68: -927.9,-6112.15 -615.15,-6112.15 ; -827.76,-4043 v1@-515,-4043
  other v1: -4919.71,-6112.15
L20: LED7.4 R10_NPNC.1 | length 6101
  Top Layer w10: LED7.4@-4279.01,-6345.48 -4279.01,-6289.25 -4253.9,-6264.15 -4097.92,-6264.15 -4083.92,-6250.15 v1(-4041.92,-6250.15) ; R10_NPNC.1@-1020.63,-4019.72 R10_NPNC.1@-1020.63,-4016.61 ; R10_NPNC.1@-1020.63,-4015.85 -974.65,-4015.85 -962.74,-4003.93 v1(-515,-4004)
  Top Layer w19.68: -5232.47,-6074.15 v1(-4919.71,-6074.15)
  Bottom Layer w10: v1(-4919.71,-6074.15) -4831.9,-6074.15 -4652.9,-6253.15 -4044.92,-6253.15 v1(-4041.92,-6250.15) -4027.92,-6236.15 -1159.39,-6236.15 -1117.9,-6194.66 -1117.9,-6086.15 -1105.9,-6074.15 -927.9,-6074.15 ; -650.87,-4004 v1(-515,-4004)
  Bottom Layer w19.68: -927.9,-6074.15 -615.15,-6074.15 ; -827.76,-4004 v1(-515,-4004)
L21: LED7.2 R13_NPNC.1 | length 7141
  Top Layer w10: -4340.9,-6254.15 -4340.03,-6255.02 ; LED7.2@-4340.03,-6345.48 -4340.03,-6255.02 ; v1(-4072.92,-6227.15) -4176.49,-6227.15 -4188.92,-6239.58 -4324.59,-6239.58 -4340.03,-6255.02 ; R13_NPNC.1@-1350.63,-4405.97 -1277.09,-4332.44 -1277.09,-4257.85 -1260.09,-4240.85 -1260.09,-3950.92 -1205.11,-3895.93 -849.07,-3895.93 -780,-3965 v1(-515,-3965)
  Top Layer w19.68: -5232.47,-6035.15 v1(-4919.71,-6035.15)
  Bottom Layer w10: v1(-4919.71,-6035.15) -4839.9,-6035.15 -4637.9,-6237.15 -4240.92,-6237.15 -4230.92,-6227.15 v1(-4072.92,-6227.15) -4064.92,-6219.15 -1165.02,-6219.15 -1133.9,-6188.03 -1133.9,-6066.15 -1102.9,-6035.15 -927.9,-6035.15 ; -827.76,-3965 v1(-515,-3965)
  Bottom Layer w19.68: -927.9,-6035.15 -615.15,-6035.15 ; -827.76,-3965 v1(-515,-3965)
L22: LED8.6 R16_NPNC.1 | length 6679.5
  Top Layer w10: LED8.6@-4756.05,-6345.48 -4756.05,-6311.3 -4647.9,-6203.15 v1(-4628.9,-6203.15) ; R16_NPNC.1@-1349.92,-4263.57 -1276.09,-4189.74 -1276.09,-3944.29 -1211.73,-3879.93 -636.07,-3879.93 -590,-3926 v1(-515,-3926)
  Top Layer w19.68: -5232.47,-5996.15 v1(-4919.71,-5996.15)
  Bottom Layer w10: v1(-4919.71,-5996.15) -4847.9,-5996.15 -4660.9,-6183.15 -4648.9,-6183.15 v1(-4628.9,-6203.15) -1171.65,-6203.15 -1149.9,-6181.4 -1149.9,-6046.15 -1099.9,-5996.15 -927.9,-5996.15 ; -650.87,-3926 v1(-515,-3926)
  Bottom Layer w19.68: -927.9,-5996.15 -615.15,-5996.15 ; -827.76,-3926 v1(-515,-3926)
L23: LED8.4 R19_NPNC.1 | length 6887
  Top Layer w10: LED8.4@-4817.08,-6345.48 -4816.9,-6345.31 -4816.9,-6244.15 -4808.9,-6236.15 -4722.9,-6236.15 -4649.9,-6163.15 v1(-4628.9,-6163.15) ; R19_NPNC.1@-1350.63,-4120.97 -1292.09,-4062.44 -1292.09,-3937.66 -1218.36,-3863.93 -538.07,-3863.93 v1(-515,-3887)
  Top Layer w19.68: -5232.47,-5957.15 v1(-4919.71,-5957.15)
  Bottom Layer w10: v1(-4919.71,-5957.15) -4864.27,-5957.15 -4658.27,-6163.15 v1(-4628.9,-6163.15) -4565.92,-6163.15 -4544.92,-6184.15 -1175.28,-6184.15 -1165.9,-6174.78 -1165.9,-5989.78 -1133.28,-5957.15 -927.9,-5957.15 ; -827.76,-3887 v1(-515,-3887)
  Bottom Layer w19.68: -927.9,-5957.15 -615.15,-5957.15 ; -827.76,-3887 v1(-515,-3887)
L24: LED8.2 R22_NPNC.1 | length 6599.9
  Top Layer w10: LED8.2@-4878.1,-6345.48 -4878.1,-6230.35 -4867.9,-6220.15 -4757.87,-6220.15 -4660.87,-6123.15 v1(-4634.92,-6123.15) ; R22_NPNC.1@-1350.63,-3972.03 -1349.09,-3972.03 -1224.99,-3847.93 v1(-515,-3848)
  Top Layer w19.68: -5232.47,-5918.15 v1(-4919.71,-5918.15)
  Bottom Layer w10: v1@-4919.71,-5920.15 -4771.9,-5920.15 -4568.9,-6123.15 ; v1(-4634.92,-6123.15) -4568.9,-6123.15 ; -928.9,-5917.15 -1115.9,-5917.15 -1181.9,-5983.15 -1181.9,-6168.15 -4523.9,-6168.15 -4568.9,-6123.15
  Bottom Layer w19.68: -927.9,-5918.15 -615.15,-5918.15 ; -827.76,-3848 v1(-515,-3848)
L_OUT: U6.26
LAT: J1.6 J5.6 pad.0@-5939.92,-4073.15 U2.11 U3.11 U4.11 U6.6 | length 8267.9
  Top Layer w8: pad.0@-5939.92,-4073.15 -5899.92,-4033.15 -5899.92,-3924.92 -5870,-3895 -4893.62,-3895 -4653.83,-4134.79 ; -4654.19,-4135.15 -4654.19,-4166.95 -4654.33,-4167.09 -4654.33,-4213.74 -4644.92,-4223.15 -4527.21,-4223.15 J1.6@-4486.85,-4182.8 -4430.57,-4182.8 -4324.92,-4077.15 -4160.92,-4077.15 -4134.92,-4103.15 -4134.92,-4278.15 -4129.92,-4283.15 -4084.92,-4283.15 -4059.92,-4258.15 U2.11@-4059.92,-4219.08 -4059.92,-4168.35 -3880.72,-3989.15 -2988.92,-3989.15 -2964.92,-4013.15 -2964.92,-4183.15 -2959.92,-4188.15 -2914.92,-4188.15 -2889.48,-4162.71 U3.11@-2889.48,-4129.6 -2889.48,-4027.71 -2726.92,-3865.15 -1842.76,-3865.15 -1794.92,-3912.98 -1794.92,-4053.15 -1781.04,-4067.03 -1749.92,-4067.03 -1718.8,-4035.91 U4.11@-1718.8,-4001.02
  Top Layer w10: v1(-558.92,-1281.15) -536.92,-1303.15 U6.6@-484.06,-1303.15
  Bottom Layer w10: J5.6@-1916.29,-142.8 -1916.29,-164.1 -1877.73,-202.66 -1877.73,-257.19 -1938.84,-318.3 -1938.84,-323.15 -2089.92,-474.23 -2089.92,-905.44 -2062.52,-932.85 -846.46,-932.85 -785.92,-993.39 -785.92,-1072.15 -669.92,-1188.15 -629.92,-1188.15 -558.92,-1259.15 v1(-558.92,-1281.15)
LCD_WR: P1.21 U6.7 | length 702.1
  Top Layer w10: v1(-559.92,-1333.15) -539.92,-1353.15 U6.7@-484.06,-1353.15
  Bottom Layer w10: P1.21@-589.92,-1893.15 -589.92,-1748.15 -504.92,-1663.15 -504.92,-1388.15 v1(-559.92,-1333.15)
MCLR: P4.1 R58.1 U6.1 | length 230.1
  Top Layer w10: R58.1@-584.92,-1052.68 -584.45,-1053.15 U6.1@-484.06,-1053.15 -484.06,-1049.02 v1(-514.92,-1018.15)
  Bottom Layer w10: v1(-514.92,-1018.15) -499.92,-1003.15 P4.1@-499.92,-943.15
NetC9_2: C9.2 U6.20 | length 96.9
  Top Layer w10: U6.20@-125.79,-1453.15 -32.48,-1453.15 C9.2@-29.92,-1450.59
NetD1_2: D1.2 D2.1 | length 135
  Bottom Layer w50: D2.1@747.5,-1743.92 D1.2@882.5,-1743.92
NetD3_IO1_1: D3_IO1.1 J3_IO1.5 U7_IO1.2 | length 870.6
  Bottom Layer w20: J3_IO1.5@-1053.81,-295.28 -1058.81,-300.28 -871.89,-300.28 D3_IO1.1@-679.92,-492.24 -679.92,-518.15 -609.92,-588.15 -449.92,-588.15 U7_IO1.2@-364.92,-503.15
NetD3_IO1_2: D3_IO1.2 R63_IO1.2 U7_IO1.1 | length 2139.8
  Top Layer w20: R63_IO1.2@-1524.83,-473.15 -1404.83,-593.15 -287.69,-593.15 -264.92,-570.38 U7_IO1.1@-264.92,-503.15
  Bottom Layer w20: D3_IO1.2@-679.92,-909.06 D3_IO1.2@-679.92,-904.06 -679.92,-718.15 -599.92,-638.15 -299.92,-638.15 -264.92,-603.15 U7_IO1.1@-264.92,-503.15
NetD3_IO2_1: D3_IO2.1 J3_IO2.5 U7_IO2.2 | length 1474.9
  Bottom Layer w20: J3_IO2.5@616.67,-299.43 1099.48,-782.24 1340.08,-782.24 1340.08,-907.24 D3_IO2.1@1345.08,-912.24 ; D3_IO2.1@1340.08,-912.24 1340.08,-978.15 1405.08,-1043.15 1575.08,-1043.15 1615.08,-1003.15 U7_IO2.2@1615.08,-968.15
NetD3_IO2_2: D3_IO2.2 R63_IO2.2 U7_IO2.1 | length 2307.7
  Top Layer w10: R63_IO2.2@453.32,-476.02 526.93,-402.42 1485.08,-402.42 1520.08,-437.42 1520.08,-873.15 1560.08,-913.15 1660.08,-913.15 U7_IO2.1@1715.08,-968.15 U7_IO2.1@1706.6,-968.15
  Bottom Layer w20: D3_IO2.2@1345.08,-1324.06 1575.98,-1093.15 1590.08,-1093.15 U7_IO2.1@1715.08,-968.15
NetD5_1: D5.1 J6.1 | length 1187.2
  Bottom Layer w50: D5.1@1895.08,-1442.28 1925.08,-1412.28 1925.08,-448.15 2027.97,-345.26 J6.1@2063.12,-345.26
NetJ3_IO1_4: J3_IO1.4 R63_IO1.1 | length 344.4
  Top Layer w20: R63_IO1.1@-1583.89,-473.15 -1583.89,-503.62 v1(-1559.36,-528.15)
  Bottom Layer w20: v1(-1559.36,-528.15) -1559.36,-407.13 J3_IO1.4@-1447.51,-295.28
NetJ3_IO2_4: J3_IO2.4 R63_IO2.1 | length 377.9
  Top Layer w20: R63_IO2.1@394.26,-476.02 394.26,-506.5 v1(418.79,-531.02)
  Bottom Layer w20: J3_IO2.4@222.96,-299.43 418.79,-495.26 v1(418.79,-531.02)
NetJ4_IO1_4: J4_IO1.4 Q20_IO1.1 R64_IO1.1 | length 1630.2
  Top Layer w10: v1(-625.92,-453.15) -595.39,-453.15 R64_IO1.1@-579.92,-468.62 -541.3,-430 -186.98,-430 -153.83,-463.15 -153.83,-691.65 136.08,-981.57 136.08,-1189.86 Q20_IO1.1@215.08,-1268.86
  Bottom Layer w20: v1(-625.92,-453.15) -625.92,-308.69 J4_IO1.4@-612.51,-295.28
NetJ4_IO2_4: J4_IO2.4 Q20_IO2.1 R64_IO2.1 | length 509.9
  Top Layer w10: v1(1135.08,-453.15) 1304.13,-453.15 R64_IO2.1@1329.61,-478.62 1334.37,-473.86 Q20_IO2.1@1430.08,-473.86
  Bottom Layer w10: J4_IO2.4@1046.11,-311.28 1057.96,-299.43 1057.96,-376.04 v1(1135.08,-453.15)
NetJ7_TIP: J7.TIP P2.3 R66.1 | length 2448.3
  Top Layer w8: v1(-719.92,-1428.15) -719.92,-1312.76 R66.1@-559.06,-1151.89 ; v1(-638,-1838) -570.07,-1838 -539.92,-1868.15 -539.92,-2028.15 -529.92,-2038.15 -294.92,-2038.15 v1(20.08,-2353.15)
  Bottom Layer w8: P2.3@-789.92,-1533.15 -714.92,-1533.15 ; v1(-719.92,-1428.15) -714.92,-1433.15 -714.92,-1533.15 ; v1(-638,-1838) -650.07,-1838 -714.92,-1773.15 -714.92,-1533.15 ; v1(20.08,-2353.15) 40.08,-2333.15 247.08,-2333.15 310.08,-2396.15 J7.TIP@600.08,-2396.15
NetJ8_TIP: J8.TIP P2.5 R67.1 | length 1941.8
  Top Layer w8: v1(-798.92,-1259.15) -716.39,-1259.15 R67.1@-609.92,-1152.68 ; v1@-712.89,-1843.15 v1(-704.92,-1843.15) -666.07,-1843.15 -644.92,-1864.3 -644.92,-2033.15 -619.92,-2058.15 -429.92,-2058.15 v1(-169.92,-2318.15)
  Bottom Layer w8: -787.91,-1266.14 -744.92,-1309.14 -744.92,-1393.15 -784.92,-1433.15 P2.5@-789.92,-1433.15 -829.92,-1473.15 -829.92,-1568.15 -814.92,-1583.15 -749.92,-1583.15 -739.92,-1593.15 -739.92,-1808.15 v1(-704.92,-1843.15) ; v1(-169.92,-2318.15) -91.92,-2396.15 J8.TIP@-54.92,-2396.15
NetP2_1: P2.1 R68.2 | length 698.3
  Top Layer w8: v1(-896.92,-1262.15) -880.12,-1262.15 -815.22,-1197.25 -709.92,-1197.25 R68.2@-709.92,-1152.21
  Bottom Layer w8: v1(-896.92,-1262.15) -850.92,-1308.15 -849.92,-1308.15 -844.92,-1313.15 -844.92,-1618.15 -829.92,-1633.15 P2.1@-789.92,-1633.15
NetP2_2: P2.2 R70.2 | length 593.4
  Top Layer w8: v1(-962.92,-1187.15) -928.45,-1152.68 R70.2@-909.92,-1152.68
  Bottom Layer w8: v1@-959.92,-1188.15 -983.92,-1212.15 -983.92,-1458.95 -949.92,-1492.95 -949.92,-1628.15 -944.92,-1633.15 P2.2@-889.92,-1633.15
NetP2_4: P2.4 R71.2 | length 477.3
  Top Layer w8: v1(-926.92,-1189.15) -896.87,-1189.15 R71.2@-859.92,-1152.21
  Bottom Layer w8: v1(-926.92,-1189.15) -969.92,-1232.15 -969.92,-1453.15 P2.4@-889.92,-1533.15
NetP2_6: P2.6 R72.2 | length 522.7
  Top Layer w8: v1(-899.92,-1212.15) -869.87,-1212.15 R72.2@-809.92,-1152.21 R72.2@-809.92,-1159.19
  Bottom Layer w8: -952.92,-1257.15 -952.92,-1370.15 ; v1(-899.92,-1212.15) -927.92,-1212.15 -955.92,-1240.15 -955.92,-1367.15 -952.92,-1370.15 ; P2.6@-889.92,-1433.15 -952.92,-1370.15
NetP2_7: P2.7 R69.1 | length 325.8
  Top Layer w8: v1(-838.92,-1261.15) -795.92,-1218.15 -775.72,-1218.15 -709.92,-1218.15 -659.92,-1168.15 R69.1@-659.92,-1152.21
  Bottom Layer w8: v1(-838.92,-1261.15) -789.92,-1310.15 P2.7@-789.92,-1333.15
NetP2_8: P2.8 R73.2 | length 328.2
  Top Layer w8: v1(-922.92,-1238.15) -875.92,-1238.15 -816.92,-1179.15 -786.87,-1179.15 R73.2@-759.92,-1152.21
  Bottom Layer w8: v1(-922.92,-1238.15) -922.92,-1300.15 P2.8@-889.92,-1333.15 P2.8@-875.12,-1318.35
NetQ1_1: Q1.1 R25.2 R36.2 | length 98.9
  Top Layer w10: Q1.1@-4519.3,-4564.75 -4519.3,-4522.06 R25.2@-4514.92,-4517.68 R36.2@-4464.92,-4517.68
NetQ2_1: Q2.1 R26.2 R37.2 | length 101.5
  Top Layer w6: Q2.1@-4669.3,-4564.75 -4679.92,-4554.13 R26.2@-4679.92,-4517.68 R37.2@-4629.92,-4517.68
NetQ3_1: Q3.1 R27.2 R38.2 | length 103.5
  Top Layer w6: Q3.1@-4819.3,-4564.75 -4819.3,-4554.75 -4834.92,-4539.13 R27.2@-4834.92,-4517.68 R38.2@-4784.92,-4517.68
NetQ4_1: Q4.1 R28.2 R39.2 | length 105.6
  Top Layer w10: Q4.1@-4969.3,-4564.75 -4969.3,-4554.75 -4989.92,-4534.13 R28.2@-4989.92,-4517.68 R39.2@-4939.92,-4517.68
NetQ5_1: Q5.1 R29.2 R40.2 | length 104.8
  Top Layer w6: R29.2@-5144.92,-4529.13 R29.2@-5144.92,-4517.68 -5119.3,-4543.3 ; Q5.1@-5119.3,-4564.75 -5119.3,-4543.3 ; R40.2@-5094.92,-4517.68 -5119.3,-4542.06 -5119.3,-4543.3
NetQ6_1: Q6.1 R30.2 R41.2 | length 105.1
  Top Layer w6: R30.2@-5299.92,-4517.68 R41.2@-5249.92,-4517.68
  Top Layer w10: Q6.1@-5269.3,-4564.75 -5249.92,-4545.37 R41.2@-5249.92,-4517.68
NetQ7_1: Q7.1 R31.2 R42.2 | length 103
  Top Layer w6: R31.2@-5454.92,-4517.68 R42.2@-5404.92,-4517.68
  Top Layer w10: Q7.1@-5419.3,-4564.75 -5404.92,-4550.37 R42.2@-5404.92,-4517.68
NetQ8_1: Q8.1 R32.2 R43.2 | length 101
  Top Layer w10: R32.2@-5609.92,-4517.68 R43.2@-5559.92,-4517.68 -5559.92,-4555.37 Q8.1@-5569.3,-4564.75
NetQ9_1: Q9.1 R33.2 R44.2 | length 98.9
  Top Layer w6: R33.2@-5764.92,-4517.68 R44.2@-5714.92,-4517.68
  Top Layer w10: Q9.1@-5719.3,-4564.75 -5719.3,-4522.06 R44.2@-5714.92,-4517.68
NetQ10_1: Q10.1 R34.2 R45.2 | length 97.3
  Top Layer w6: R34.2@-5919.92,-4517.68 R45.2@-5869.92,-4517.68
  Top Layer w10: R45.2@-5869.92,-4517.68 -5869.3,-4518.3 Q10.1@-5869.3,-4564.75
NetQ11_1: Q11.1 R35.2 R46.2 | length 98.3
  Top Layer w6: R35.2@-6074.92,-4517.68 R46.2@-6024.92,-4517.68
  Top Layer w10: R46.2@-6024.92,-4517.68 -6024.29,-4518.31 Q11.1@-6024.29,-4565.75
NetQ12_NPNA_1: Q12_NPNA.1 R1_NPNA.2 R2_NPNA.2 | length 103.1
  Top Layer w10: R2_NPNA.2@-3438.39,-4588.15 -3438.39,-4630.91 Q12_NPNA.1@-3445.63,-4638.15 -3433.39,-4650.39 R1_NPNA.2@-3433.39,-4683.15
NetQ12_NPNA_2: Q12_NPNA.2 R3_NPNA.2 | length 945.4
  Top Layer w6: R3_NPNA.2@-4359.92,-4557.16 R3_NPNA.2@-4359.92,-4553.1 -4215.39,-4697.63 -3611.09,-4697.63 -3536.18,-4622.72 -3536.18,-4598.78 Q12_NPNA.2@-3534.21,-4596.81
NetQ12_NPNB_1: Q12_NPNB.1 R1_NPNB.2 R2_NPNB.2 | length 103.1
  Top Layer w10: R2_NPNB.2@-2268.39,-4488.15 -2268.39,-4530.91 Q12_NPNB.1@-2275.63,-4538.15 -2263.39,-4550.39 R1_NPNB.2@-2263.39,-4583.15
NetQ12_NPNB_2: Q12_NPNB.2 R3_NPNB.2 | length 945.4
  Top Layer w6: R3_NPNB.2@-3189.92,-4457.16 R3_NPNB.2@-3189.92,-4453.1 -3045.39,-4597.63 -2441.09,-4597.63 -2366.18,-4522.72 -2366.18,-4498.78 Q12_NPNB.2@-2364.21,-4496.81
NetQ12_NPNC_1: Q12_NPNC.1 R1_NPNC.2 R2_NPNC.2 | length 103.1
  Top Layer w10: R2_NPNC.2@-1097.56,-4365.55 -1097.56,-4408.31 Q12_NPNC.1@-1104.8,-4415.55 -1092.56,-4427.8 R1_NPNC.2@-1092.56,-4460.55
NetQ12_NPNC_2: Q12_NPNC.2 R3_NPNC.2 | length 945.4
  Top Layer w6: R3_NPNC.2@-2019.09,-4334.57 R3_NPNC.2@-2019.09,-4330.5 -1874.56,-4475.03 -1270.26,-4475.03 -1195.35,-4400.13 -1195.35,-4376.18 Q12_NPNC.2@-1193.39,-4374.21
NetQ13_NPNA_1: Q13_NPNA.1 R4_NPNA.2 R5_NPNA.2 | length 118.8
  Top Layer w10: R4_NPNA.2@-3429.21,-4540.75 R4_NPNA.2@-3429.21,-4522.99 ; R4_NPNA.2@-3428.39,-4530.75 -3428.39,-4510.39 -3450.63,-4488.15 -3428.39,-4465.91 R5_NPNA.2@-3428.39,-4448.15
NetQ13_NPNA_2: Q13_NPNA.2 R6_NPNA.2 | length 1020.5
  Top Layer w6: R6_NPNA.2@-4309.92,-4557.16 R6_NPNA.2@-4309.92,-4553.1 -4177.39,-4685.63 -3616.06,-4685.63 -3579.92,-4649.49 -3579.92,-4497.52 -3537.13,-4454.72 Q13_NPNA.2@-3534.21,-4451.81
NetQ13_NPNB_1: Q13_NPNB.1 R4_NPNB.2 R5_NPNB.2 | length 118.8
  Top Layer w10: R4_NPNB.2@-2259.21,-4440.75 R4_NPNB.2@-2259.21,-4422.99 ; R4_NPNB.2@-2258.39,-4430.75 -2258.39,-4410.39 -2280.63,-4388.15 -2258.39,-4365.91 R5_NPNB.2@-2258.39,-4348.15
NetQ13_NPNB_2: Q13_NPNB.2 R6_NPNB.2 | length 1020.5
  Top Layer w6: R6_NPNB.2@-3139.92,-4457.16 R6_NPNB.2@-3139.92,-4453.1 -3007.39,-4585.63 -2446.06,-4585.63 -2409.92,-4549.49 -2409.92,-4397.52 -2367.13,-4354.72 Q13_NPNB.2@-2364.21,-4351.81
NetQ13_NPNC_1: Q13_NPNC.1 R4_NPNC.2 R5_NPNC.2 | length 118.8
  Top Layer w10: R4_NPNC.2@-1088.39,-4318.15 R4_NPNC.2@-1088.39,-4300.39 ; R4_NPNC.2@-1087.56,-4308.15 -1087.56,-4287.8 -1109.8,-4265.55 -1087.56,-4243.31 R5_NPNC.2@-1087.56,-4225.55
NetQ13_NPNC_2: Q13_NPNC.2 R6_NPNC.2 | length 1020.5
  Top Layer w6: R6_NPNC.2@-1969.09,-4334.57 R6_NPNC.2@-1969.09,-4330.5 -1836.56,-4463.03 -1275.23,-4463.03 -1239.09,-4426.89 -1239.09,-4274.92 -1196.3,-4232.13 Q13_NPNC.2@-1193.39,-4229.21
NetQ14_NPNA_1: Q14_NPNA.1 R7_NPNA.2 R8_NPNA.2 | length 90
  Top Layer w10: R7_NPNA.2@-3428.39,-4393.15 -3428.39,-4365.39 R8_NPNA.2@-3428.39,-4303.15